# Altium PCB Flight Controller.PcbDoc (part 2 of 3)
Units mm, origin at the board's own origin, x right, y up, seen from the top; angles counter-clockwise.
Board outline 152.4 x 101.6 mm, 22 copper layers (F.Cu, F.Mask, B.Cu, B.Mask, In1.Cu, F.SilkS, In2.Cu, B.SilkS, In3.Cu, F.Adhes, In4.Cu, B.Adhes, F.Paste, B.Paste, Dwgs.User, Cmts.User, Eco1.User, Eco2.User, Edge.Cuts, Margin, B.CrtYd, F.CrtYd); 168 components, 0 nets, 572 pads, 361 vias.
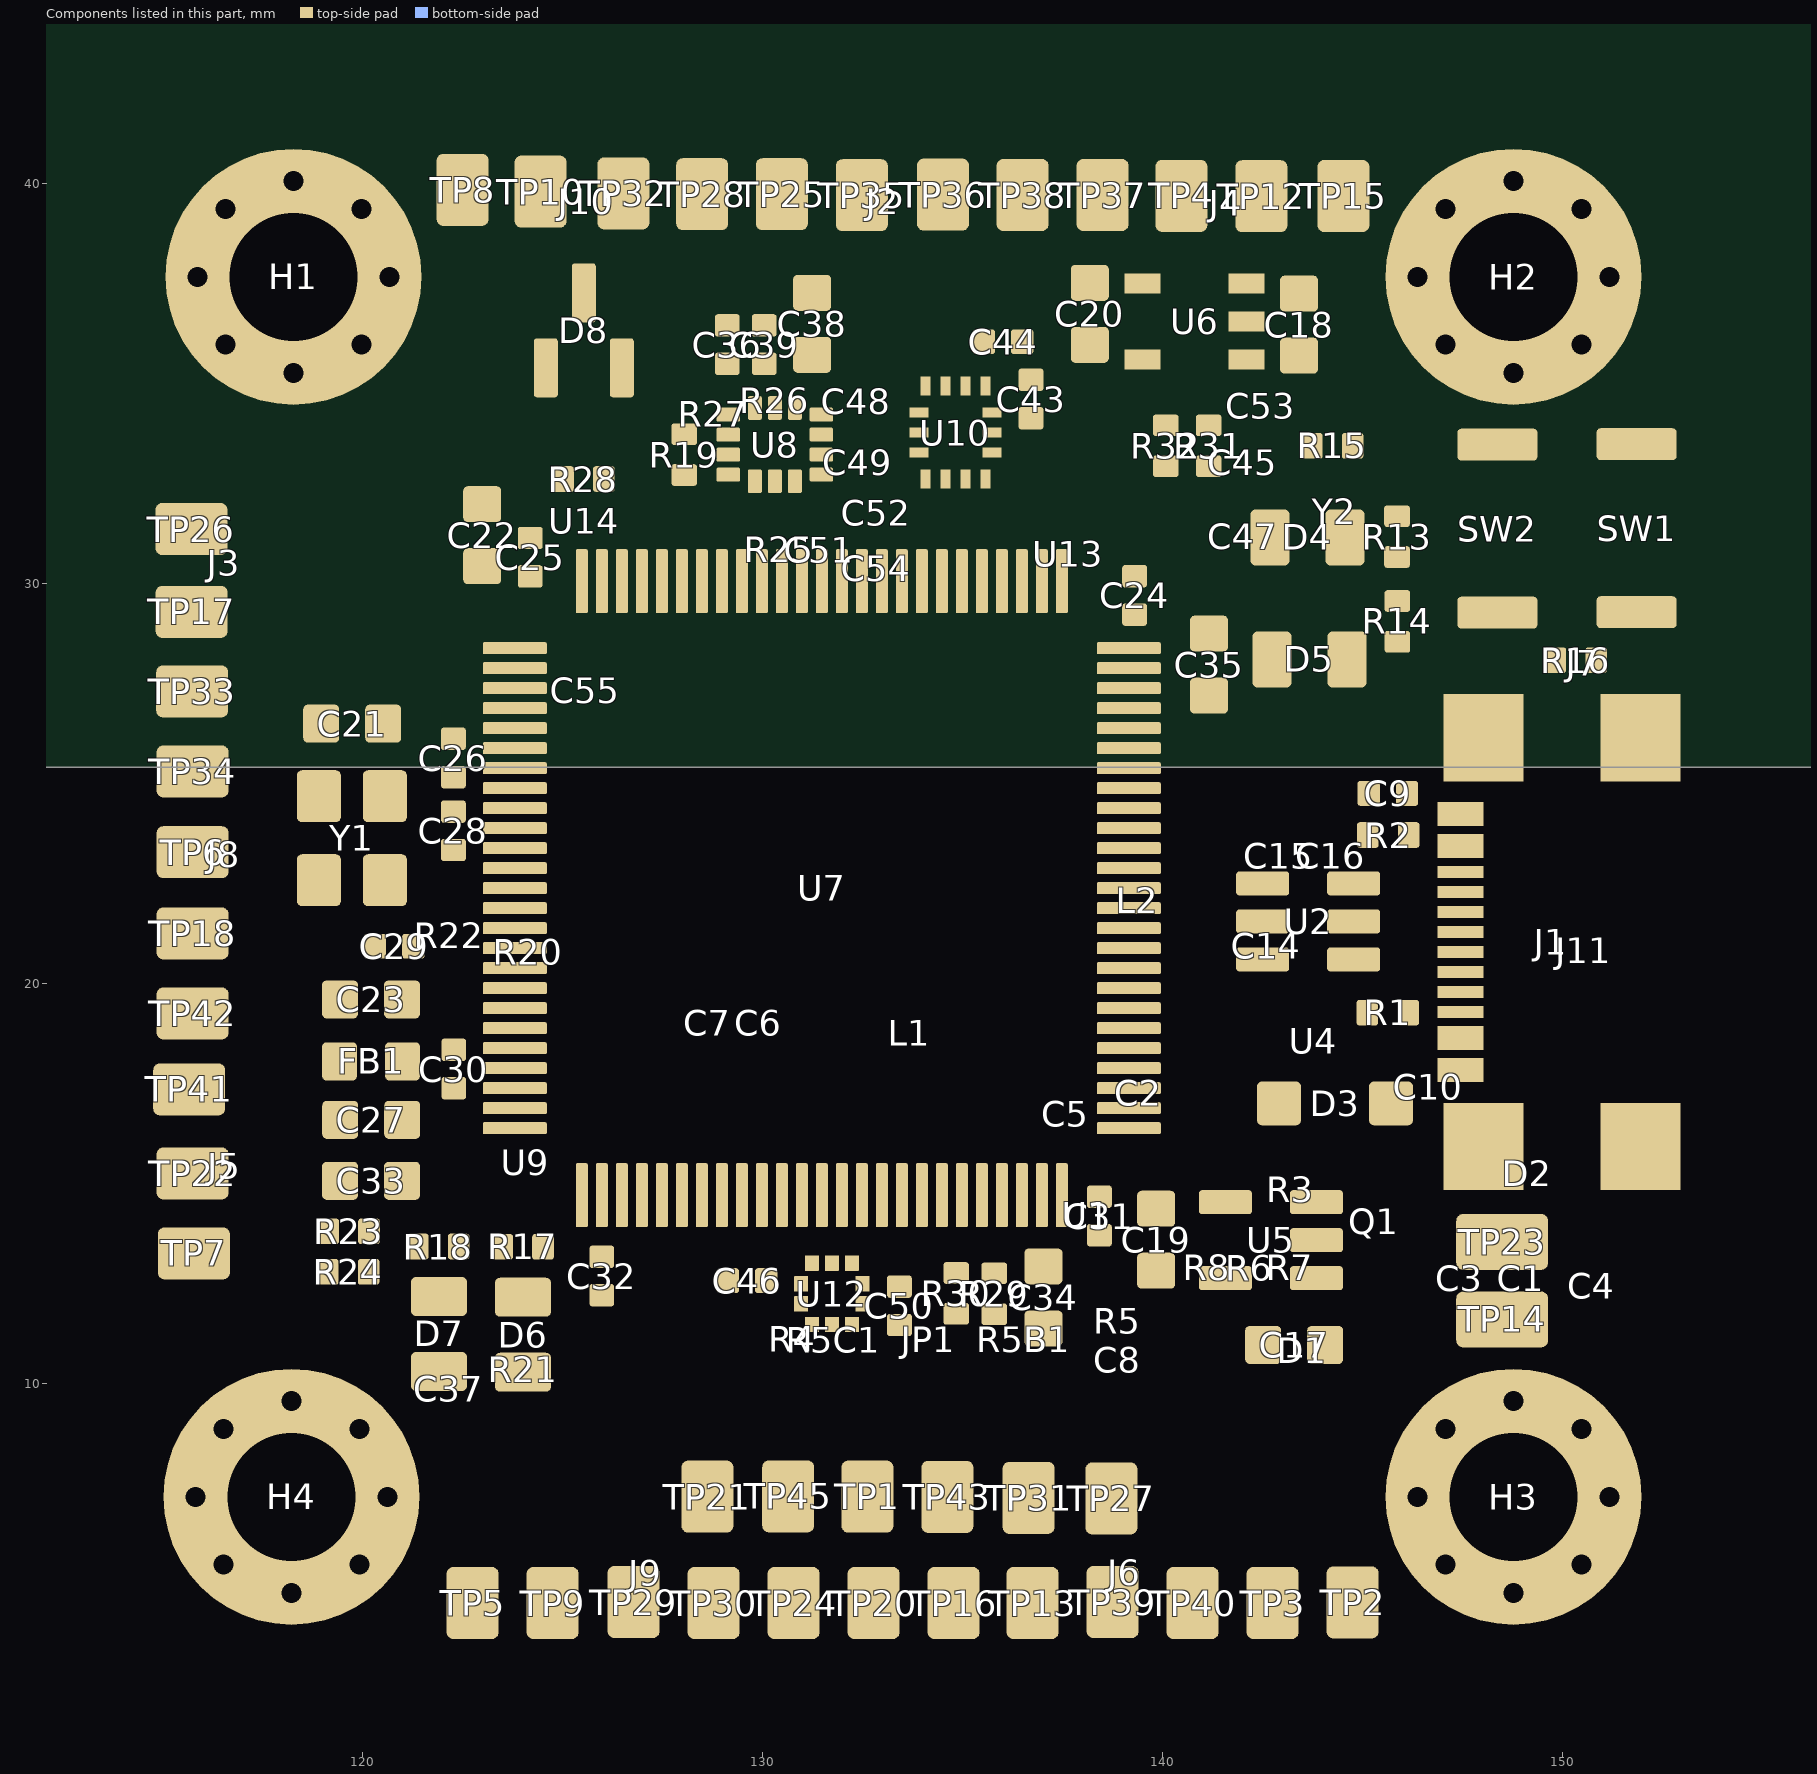
[diagram p13: the components of this part, seen from the top]

## Footprints (in the part's own frame and the unit in brackets; to place one, negate y for a bottom-side part, rotate by r counter-clockwise, add the part's x,y. Pads: shape width x height; smd on the part's side, far side on the other; paste and mask are expansions set on the pad) (continued)
PQFN50P300X250X97-14N [mm]
  rrect25% 0.59x0.35 smd paste-0.59 mask-0.59: 1(-1.165,0.75) 2(-1.165,0.25) 3(-1.165,-0.25) 4(-1.165,-0.75) 8(1.165,-0.75) 9(1.165,-0.25) 10(1.165,0.25) 11(1.165,0.75)
  rrect25% 0.35x0.59 smd paste-0.59 mask-0.59: 5(-0.5,-0.915) 6(0,-0.915) 7(0.5,-0.915) 12(0.5,0.915) 13(0,0.915) 14(-0.5,0.915)
  F.Mask region: -0.932,0.974 -0.925,0.973 -0.919,0.972 -0.913,0.971 -0.906,0.969 -0.9,0.967 -0.894,0.964 -0.888,0.961 -0.882,0.958 -0.877,0.955 -0.872,0.951 -0.866,0.947 -0.861,0.943 -0.857,0.938 -0.852,0.934 -0.848,0.929 -0.844,0.923 -0.84,0.918 -0.837,0.912 -0.834,0.907 -0.831,0.901 -0.828,0.895 -0.826,0.889 -0.824,0.882 -0.823,0.876 -0.822,0.87 -0.821,0.863 -0.82,0.857 -0.82,0.85 -0.82,0.65 -0.82,0.643 -0.821,0.637 -0.822,0.63 -0.823,0.624 -0.824,0.618 -0.826,0.611 -0.828,0.605 -0.831,0.599 -0.834,0.593 -0.837,0.588 -0.84,0.582 -0.844,0.577 -0.848,0.571 -0.852,0.566 -0.857,0.562 -0.861,0.557 -0.866,0.553 -0.872,0.549 -0.877,0.545 -0.882,0.542 -0.888,0.539 -0.894,0.536 -0.9,0.533 -0.906,0.531 -0.913,0.529 -0.919,0.528 -0.925,0.527 -0.932,0.526 -0.938,0.525 -1.392,0.525 -1.398,0.526 -1.405,0.527 -1.411,0.528 -1.417,0.529 -1.424,0.531 -1.43,0.533 -1.436,0.536 -1.442,0.539 -1.448,0.542 -1.453,0.545 -1.458,0.549 -1.464,0.553 -1.469,0.557 -1.473,0.562 -1.478,0.566 -1.482,0.571 -1.486,0.577 -1.49,0.582 -1.493,0.588 -1.496,0.593 -1.499,0.599 -1.502,0.605 -1.504,0.611 -1.506,0.618 -1.507,0.624 -1.508,0.63 -1.509,0.637 -1.51,0.643 -1.51,0.65 -1.51,0.85 -1.51,0.857 -1.509,0.863 -1.508,0.87 -1.507,0.876 -1.506,0.882 -1.504,0.889 -1.502,0.895 -1.499,0.901 -1.496,0.907 -1.493,0.912 -1.49,0.918 -1.486,0.923 -1.482,0.929 -1.478,0.934 -1.473,0.938 -1.469,0.943 -1.464,0.947 -1.458,0.951 -1.453,0.955 -1.448,0.958 -1.442,0.961 -1.436,0.964 -1.43,0.967 -1.424,0.969 -1.417,0.971 -1.411,0.972 -1.405,0.973 -1.398,0.974 -1.392,0.975 -0.938,0.975
  F.Mask region: -0.932,0.474 -0.925,0.473 -0.919,0.472 -0.913,0.471 -0.906,0.469 -0.9,0.467 -0.894,0.464 -0.888,0.461 -0.882,0.458 -0.877,0.455 -0.872,0.451 -0.866,0.447 -0.861,0.443 -0.857,0.438 -0.852,0.434 -0.848,0.429 -0.844,0.423 -0.84,0.418 -0.837,0.412 -0.834,0.407 -0.831,0.401 -0.828,0.395 -0.826,0.389 -0.824,0.382 -0.823,0.376 -0.822,0.37 -0.821,0.363 -0.82,0.357 -0.82,0.35 -0.82,0.15 -0.82,0.143 -0.821,0.137 -0.822,0.13 -0.823,0.124 -0.824,0.118 -0.826,0.111 -0.828,0.105 -0.831,0.099 -0.834,0.093 -0.837,0.088 -0.84,0.082 -0.844,0.077 -0.848,0.071 -0.852,0.066 -0.857,0.062 -0.861,0.057 -0.866,0.053 -0.872,0.049 -0.877,0.045 -0.882,0.042 -0.888,0.039 -0.894,0.036 -0.9,0.033 -0.906,0.031 -0.913,0.029 -0.919,0.028 -0.925,0.027 -0.932,0.026 -0.938,0.025 -1.392,0.025 -1.398,0.026 -1.405,0.027 -1.411,0.028 -1.417,0.029 -1.424,0.031 -1.43,0.033 -1.436,0.036 -1.442,0.039 -1.448,0.042 -1.453,0.045 -1.458,0.049 -1.464,0.053 -1.469,0.057 -1.473,0.062 -1.478,0.066 -1.482,0.071 -1.486,0.077 -1.49,0.082 -1.493,0.088 -1.496,0.093 -1.499,0.099 -1.502,0.105 -1.504,0.111 -1.506,0.118 -1.507,0.124 -1.508,0.13 -1.509,0.137 -1.51,0.143 -1.51,0.15 -1.51,0.35 -1.51,0.357 -1.509,0.363 -1.508,0.37 -1.507,0.376 -1.506,0.382 -1.504,0.389 -1.502,0.395 -1.499,0.401 -1.496,0.407 -1.493,0.412 -1.49,0.418 -1.486,0.423 -1.482,0.429 -1.478,0.434 -1.473,0.438 -1.469,0.443 -1.464,0.447 -1.458,0.451 -1.453,0.455 -1.448,0.458 -1.442,0.461 -1.436,0.464 -1.43,0.467 -1.424,0.469 -1.417,0.471 -1.411,0.472 -1.405,0.473 -1.398,0.474 -1.392,0.475 -0.938,0.475
  F.Mask region: -0.932,-0.026 -0.925,-0.027 -0.919,-0.028 -0.913,-0.029 -0.906,-0.031 -0.9,-0.033 -0.894,-0.036 -0.888,-0.039 -0.882,-0.042 -0.877,-0.045 -0.872,-0.049 -0.866,-0.053 -0.861,-0.057 -0.857,-0.062 -0.852,-0.066 -0.848,-0.071 -0.844,-0.077 -0.84,-0.082 -0.837,-0.088 -0.834,-0.093 -0.831,-0.099 -0.828,-0.105 -0.826,-0.111 -0.824,-0.118 -0.823,-0.124 -0.822,-0.13 -0.821,-0.137 -0.82,-0.143 -0.82,-0.15 -0.82,-0.35 -0.82,-0.357 -0.821,-0.363 -0.822,-0.37 -0.823,-0.376 -0.824,-0.382 -0.826,-0.389 -0.828,-0.395 -0.831,-0.401 -0.834,-0.407 -0.837,-0.412 -0.84,-0.418 -0.844,-0.423 -0.848,-0.429 -0.852,-0.434 -0.857,-0.438 -0.861,-0.443 -0.866,-0.447 -0.872,-0.451 -0.877,-0.455 -0.882,-0.458 -0.888,-0.461 -0.894,-0.464 -0.9,-0.467 -0.906,-0.469 -0.913,-0.471 -0.919,-0.472 -0.925,-0.473 -0.932,-0.474 -0.938,-0.475 -1.392,-0.475 -1.398,-0.474 -1.405,-0.473 -1.411,-0.472 -1.417,-0.471 -1.424,-0.469 -1.43,-0.467 -1.436,-0.464 -1.442,-0.461 -1.448,-0.458 -1.453,-0.455 -1.458,-0.451 -1.464,-0.447 -1.469,-0.443 -1.473,-0.438 -1.478,-0.434 -1.482,-0.429 -1.486,-0.423 -1.49,-0.418 -1.493,-0.412 -1.496,-0.407 -1.499,-0.401 -1.502,-0.395 -1.504,-0.389 -1.506,-0.382 -1.507,-0.376 -1.508,-0.37 -1.509,-0.363 -1.51,-0.357 -1.51,-0.35 -1.51,-0.15 -1.51,-0.143 -1.509,-0.137 -1.508,-0.13 -1.507,-0.124 -1.506,-0.118 -1.504,-0.111 -1.502,-0.105 -1.499,-0.099 -1.496,-0.093 -1.493,-0.088 -1.49,-0.082 -1.486,-0.077 -1.482,-0.071 -1.478,-0.066 -1.473,-0.062 -1.469,-0.057 -1.464,-0.053 -1.458,-0.049 -1.453,-0.045 -1.448,-0.042 -1.442,-0.039 -1.436,-0.036 -1.43,-0.033 -1.424,-0.031 -1.417,-0.029 -1.411,-0.028 -1.405,-0.027 -1.398,-0.026 -1.392,-0.025 -0.938,-0.025
  F.Mask region: -0.932,-0.526 -0.925,-0.527 -0.919,-0.528 -0.913,-0.529 -0.906,-0.531 -0.9,-0.533 -0.894,-0.536 -0.888,-0.539 -0.882,-0.542 -0.877,-0.545 -0.872,-0.549 -0.866,-0.553 -0.861,-0.557 -0.857,-0.562 -0.852,-0.566 -0.848,-0.571 -0.844,-0.577 -0.84,-0.582 -0.837,-0.588 -0.834,-0.593 -0.831,-0.599 -0.828,-0.605 -0.826,-0.611 -0.824,-0.618 -0.823,-0.624 -0.822,-0.63 -0.821,-0.637 -0.82,-0.643 -0.82,-0.65 -0.82,-0.85 -0.82,-0.857 -0.821,-0.863 -0.822,-0.87 -0.823,-0.876 -0.824,-0.882 -0.826,-0.889 -0.828,-0.895 -0.831,-0.901 -0.834,-0.907 -0.837,-0.912 -0.84,-0.918 -0.844,-0.923 -0.848,-0.929 -0.852,-0.934 -0.857,-0.938 -0.861,-0.943 -0.866,-0.947 -0.872,-0.951 -0.877,-0.955 -0.882,-0.958 -0.888,-0.961 -0.894,-0.964 -0.9,-0.967 -0.906,-0.969 -0.913,-0.971 -0.919,-0.972 -0.925,-0.973 -0.932,-0.974 -0.938,-0.975 -1.392,-0.975 -1.398,-0.974 -1.405,-0.973 -1.411,-0.972 -1.417,-0.971 -1.424,-0.969 -1.43,-0.967 -1.436,-0.964 -1.442,-0.961 -1.448,-0.958 -1.453,-0.955 -1.458,-0.951 -1.464,-0.947 -1.469,-0.943 -1.473,-0.938 -1.478,-0.934 -1.482,-0.929 -1.486,-0.923 -1.49,-0.918 -1.493,-0.912 -1.496,-0.907 -1.499,-0.901 -1.502,-0.895 -1.504,-0.889 -1.506,-0.882 -1.507,-0.876 -1.508,-0.87 -1.509,-0.863 -1.51,-0.857 -1.51,-0.85 -1.51,-0.65 -1.51,-0.643 -1.509,-0.637 -1.508,-0.63 -1.507,-0.624 -1.506,-0.618 -1.504,-0.611 -1.502,-0.605 -1.499,-0.599 -1.496,-0.593 -1.493,-0.588 -1.49,-0.582 -1.486,-0.577 -1.482,-0.571 -1.478,-0.566 -1.473,-0.562 -1.469,-0.557 -1.464,-0.553 -1.458,-0.549 -1.453,-0.545 -1.448,-0.542 -1.442,-0.539 -1.436,-0.536 -1.43,-0.533 -1.424,-0.531 -1.417,-0.529 -1.411,-0.528 -1.405,-0.527 -1.398,-0.526 -1.392,-0.525 -0.938,-0.525
  F.Mask region: -0.387,1.259 -0.38,1.258 -0.374,1.257 -0.368,1.256 -0.361,1.254 -0.355,1.252 -0.349,1.249 -0.343,1.246 -0.338,1.243 -0.332,1.24 -0.327,1.236 -0.321,1.232 -0.316,1.228 -0.312,1.223 -0.307,1.219 -0.303,1.214 -0.299,1.208 -0.295,1.203 -0.292,1.198 -0.289,1.192 -0.286,1.186 -0.283,1.18 -0.281,1.174 -0.279,1.167 -0.278,1.161 -0.277,1.155 -0.276,1.148 -0.275,1.142 -0.275,1.135 -0.275,0.695 -0.275,0.688 -0.276,0.682 -0.277,0.675 -0.278,0.669 -0.279,0.663 -0.281,0.656 -0.283,0.65 -0.286,0.644 -0.289,0.638 -0.292,0.632 -0.295,0.627 -0.299,0.622 -0.303,0.616 -0.307,0.611 -0.312,0.607 -0.316,0.602 -0.321,0.598 -0.327,0.594 -0.332,0.59 -0.338,0.587 -0.343,0.584 -0.349,0.581 -0.355,0.578 -0.361,0.576 -0.368,0.574 -0.374,0.573 -0.38,0.572 -0.387,0.571 -0.393,0.57 -0.607,0.57 -0.613,0.571 -0.62,0.572 -0.626,0.573 -0.632,0.574 -0.639,0.576 -0.645,0.578 -0.651,0.581 -0.657,0.584 -0.663,0.587 -0.668,0.59 -0.673,0.594 -0.679,0.598 -0.684,0.602 -0.688,0.607 -0.693,0.611 -0.697,0.616 -0.701,0.622 -0.705,0.627 -0.708,0.632 -0.711,0.638 -0.714,0.644 -0.717,0.65 -0.719,0.656 -0.721,0.663 -0.722,0.669 -0.723,0.675 -0.724,0.682 -0.725,0.688 -0.725,0.695 -0.725,1.135 -0.725,1.142 -0.724,1.148 -0.723,1.155 -0.722,1.161 -0.721,1.167 -0.719,1.174 -0.717,1.18 -0.714,1.186 -0.711,1.192 -0.708,1.198 -0.705,1.203 -0.701,1.208 -0.697,1.214 -0.693,1.219 -0.688,1.223 -0.684,1.228 -0.679,1.232 -0.673,1.236 -0.668,1.24 -0.662,1.243 -0.657,1.246 -0.651,1.249 -0.645,1.252 -0.639,1.254 -0.632,1.256 -0.626,1.257 -0.62,1.258 -0.613,1.259 -0.607,1.26 -0.393,1.26
  F.Mask region: -0.387,-0.571 -0.38,-0.572 -0.374,-0.573 -0.368,-0.574 -0.361,-0.576 -0.355,-0.578 -0.349,-0.581 -0.343,-0.584 -0.338,-0.587 -0.332,-0.59 -0.327,-0.594 -0.321,-0.598 -0.316,-0.602 -0.312,-0.607 -0.307,-0.611 -0.303,-0.616 -0.299,-0.622 -0.295,-0.627 -0.292,-0.632 -0.289,-0.638 -0.286,-0.644 -0.283,-0.65 -0.281,-0.656 -0.279,-0.663 -0.278,-0.669 -0.277,-0.675 -0.276,-0.682 -0.275,-0.688 -0.275,-0.695 -0.275,-1.135 -0.275,-1.142 -0.276,-1.148 -0.277,-1.155 -0.278,-1.161 -0.279,-1.167 -0.281,-1.174 -0.283,-1.18 -0.286,-1.186 -0.289,-1.192 -0.292,-1.198 -0.295,-1.203 -0.299,-1.208 -0.303,-1.214 -0.307,-1.219 -0.312,-1.223 -0.316,-1.228 -0.321,-1.232 -0.327,-1.236 -0.332,-1.24 -0.338,-1.243 -0.343,-1.246 -0.349,-1.249 -0.355,-1.252 -0.361,-1.254 -0.368,-1.256 -0.374,-1.257 -0.38,-1.258 -0.387,-1.259 -0.393,-1.26 -0.607,-1.26 -0.613,-1.259 -0.62,-1.258 -0.626,-1.257 -0.632,-1.256 -0.639,-1.254 -0.645,-1.252 -0.651,-1.249 -0.657,-1.246 -0.663,-1.243 -0.668,-1.24 -0.673,-1.236 -0.679,-1.232 -0.684,-1.228 -0.688,-1.223 -0.693,-1.219 -0.697,-1.214 -0.701,-1.208 -0.705,-1.203 -0.708,-1.198 -0.711,-1.192 -0.714,-1.186 -0.717,-1.18 -0.719,-1.174 -0.721,-1.167 -0.722,-1.161 -0.723,-1.155 -0.724,-1.148 -0.725,-1.142 -0.725,-1.135 -0.725,-0.695 -0.725,-0.688 -0.724,-0.682 -0.723,-0.675 -0.722,-0.669 -0.721,-0.663 -0.719,-0.656 -0.717,-0.65 -0.714,-0.644 -0.711,-0.638 -0.708,-0.632 -0.705,-0.627 -0.701,-0.622 -0.697,-0.616 -0.693,-0.611 -0.688,-0.607 -0.684,-0.602 -0.679,-0.598 -0.673,-0.594 -0.668,-0.59 -0.662,-0.587 -0.657,-0.584 -0.651,-0.581 -0.645,-0.578 -0.639,-0.576 -0.632,-0.574 -0.626,-0.573 -0.62,-0.572 -0.613,-0.571 -0.607,-0.57 -0.393,-0.57
  F.Mask region: 0.113,1.259 0.12,1.258 0.126,1.257 0.132,1.256 0.139,1.254 0.145,1.252 0.151,1.249 0.157,1.246 0.163,1.243 0.168,1.24 0.173,1.236 0.179,1.232 0.184,1.228 0.188,1.223 0.193,1.219 0.197,1.214 0.201,1.208 0.205,1.203 0.208,1.198 0.211,1.192 0.214,1.186 0.217,1.18 0.219,1.174 0.221,1.167 0.222,1.161 0.223,1.155 0.224,1.148 0.225,1.142 0.225,1.135 0.225,0.695 0.225,0.688 0.224,0.682 0.223,0.675 0.222,0.669 0.221,0.663 0.219,0.656 0.217,0.65 0.214,0.644 0.211,0.638 0.208,0.632 0.205,0.627 0.201,0.622 0.197,0.616 0.193,0.611 0.188,0.607 0.184,0.602 0.179,0.598 0.173,0.594 0.168,0.59 0.163,0.587 0.157,0.584 0.151,0.581 0.145,0.578 0.139,0.576 0.132,0.574 0.126,0.573 0.12,0.572 0.113,0.571 0.107,0.57 -0.107,0.57 -0.113,0.571 -0.12,0.572 -0.126,0.573 -0.132,0.574 -0.139,0.576 -0.145,0.578 -0.151,0.581 -0.157,0.584 -0.163,0.587 -0.168,0.59 -0.173,0.594 -0.179,0.598 -0.184,0.602 -0.188,0.607 -0.193,0.611 -0.197,0.616 -0.201,0.622 -0.205,0.627 -0.208,0.632 -0.211,0.638 -0.214,0.644 -0.217,0.65 -0.219,0.656 -0.221,0.663 -0.222,0.669 -0.223,0.675 -0.224,0.682 -0.225,0.688 -0.225,0.695 -0.225,1.135 -0.225,1.142 -0.224,1.148 -0.223,1.155 -0.222,1.161 -0.221,1.167 -0.219,1.174 -0.217,1.18 -0.214,1.186 -0.211,1.192 -0.208,1.198 -0.205,1.203 -0.201,1.208 -0.197,1.214 -0.193,1.219 -0.188,1.223 -0.184,1.228 -0.179,1.232 -0.173,1.236 -0.168,1.24 -0.162,1.243 -0.157,1.246 -0.151,1.249 -0.145,1.252 -0.139,1.254 -0.132,1.256 -0.126,1.257 -0.12,1.258 -0.113,1.259 -0.107,1.26 0.107,1.26
  F.Mask region: 0.113,-0.571 0.12,-0.572 0.126,-0.573 0.132,-0.574 0.139,-0.576 0.145,-0.578 0.151,-0.581 0.157,-0.584 0.163,-0.587 0.168,-0.59 0.173,-0.594 0.179,-0.598 0.184,-0.602 0.188,-0.607 0.193,-0.611 0.197,-0.616 0.201,-0.622 0.205,-0.627 0.208,-0.632 0.211,-0.638 0.214,-0.644 0.217,-0.65 0.219,-0.656 0.221,-0.663 0.222,-0.669 0.223,-0.675 0.224,-0.682 0.225,-0.688 0.225,-0.695 0.225,-1.135 0.225,-1.142 0.224,-1.148 0.223,-1.155 0.222,-1.161 0.221,-1.167 0.219,-1.174 0.217,-1.18 0.214,-1.186 0.211,-1.192 0.208,-1.198 0.205,-1.203 0.201,-1.208 0.197,-1.214 0.193,-1.219 0.188,-1.223 0.184,-1.228 0.179,-1.232 0.173,-1.236 0.168,-1.24 0.163,-1.243 0.157,-1.246 0.151,-1.249 0.145,-1.252 0.139,-1.254 0.132,-1.256 0.126,-1.257 0.12,-1.258 0.113,-1.259 0.107,-1.26 -0.107,-1.26 -0.113,-1.259 -0.12,-1.258 -0.126,-1.257 -0.132,-1.256 -0.139,-1.254 -0.145,-1.252 -0.151,-1.249 -0.157,-1.246 -0.163,-1.243 -0.168,-1.24 -0.173,-1.236 -0.179,-1.232 -0.184,-1.228 -0.188,-1.223 -0.193,-1.219 -0.197,-1.214 -0.201,-1.208 -0.205,-1.203 -0.208,-1.198 -0.211,-1.192 -0.214,-1.186 -0.217,-1.18 -0.219,-1.174 -0.221,-1.167 -0.222,-1.161 -0.223,-1.155 -0.224,-1.148 -0.225,-1.142 -0.225,-1.135 -0.225,-0.695 -0.225,-0.688 -0.224,-0.682 -0.223,-0.675 -0.222,-0.669 -0.221,-0.663 -0.219,-0.656 -0.217,-0.65 -0.214,-0.644 -0.211,-0.638 -0.208,-0.632 -0.205,-0.627 -0.201,-0.622 -0.197,-0.616 -0.193,-0.611 -0.188,-0.607 -0.184,-0.602 -0.179,-0.598 -0.173,-0.594 -0.168,-0.59 -0.162,-0.587 -0.157,-0.584 -0.151,-0.581 -0.145,-0.578 -0.139,-0.576 -0.132,-0.574 -0.126,-0.573 -0.12,-0.572 -0.113,-0.571 -0.107,-0.57 0.107,-0.57
  F.Mask region: 0.613,1.259 0.62,1.258 0.626,1.257 0.632,1.256 0.639,1.254 0.645,1.252 0.651,1.249 0.657,1.246 0.662,1.243 0.668,1.24 0.673,1.236 0.679,1.232 0.684,1.228 0.688,1.223 0.693,1.219 0.697,1.214 0.701,1.208 0.705,1.203 0.708,1.198 0.711,1.192 0.714,1.186 0.717,1.18 0.719,1.174 0.721,1.167 0.722,1.161 0.723,1.155 0.724,1.148 0.725,1.142 0.725,1.135 0.725,0.695 0.725,0.688 0.724,0.682 0.723,0.675 0.722,0.669 0.721,0.663 0.719,0.656 0.717,0.65 0.714,0.644 0.711,0.638 0.708,0.632 0.705,0.627 0.701,0.622 0.697,0.616 0.693,0.611 0.688,0.607 0.684,0.602 0.679,0.598 0.673,0.594 0.668,0.59 0.662,0.587 0.657,0.584 0.651,0.581 0.645,0.578 0.639,0.576 0.632,0.574 0.626,0.573 0.62,0.572 0.613,0.571 0.607,0.57 0.393,0.57 0.387,0.571 0.38,0.572 0.374,0.573 0.368,0.574 0.361,0.576 0.355,0.578 0.349,0.581 0.343,0.584 0.337,0.587 0.332,0.59 0.327,0.594 0.321,0.598 0.316,0.602 0.312,0.607 0.307,0.611 0.303,0.616 0.299,0.622 0.295,0.627 0.292,0.632 0.289,0.638 0.286,0.644 0.283,0.65 0.281,0.656 0.279,0.663 0.278,0.669 0.277,0.675 0.276,0.682 0.275,0.688 0.275,0.695 0.275,1.135 0.275,1.142 0.276,1.148 0.277,1.155 0.278,1.161 0.279,1.167 0.281,1.174 0.283,1.18 0.286,1.186 0.289,1.192 0.292,1.198 0.295,1.203 0.299,1.208 0.303,1.214 0.307,1.219 0.312,1.223 0.316,1.228 0.321,1.232 0.327,1.236 0.332,1.24 0.338,1.243 0.343,1.246 0.349,1.249 0.355,1.252 0.361,1.254 0.368,1.256 0.374,1.257 0.38,1.258 0.387,1.259 0.393,1.26 0.607,1.26
  F.Mask region: 0.613,-0.571 0.62,-0.572 0.626,-0.573 0.632,-0.574 0.639,-0.576 0.645,-0.578 0.651,-0.581 0.657,-0.584 0.662,-0.587 0.668,-0.59 0.673,-0.594 0.679,-0.598 0.684,-0.602 0.688,-0.607 0.693,-0.611 0.697,-0.616 0.701,-0.622 0.705,-0.627 0.708,-0.632 0.711,-0.638 0.714,-0.644 0.717,-0.65 0.719,-0.656 0.721,-0.663 0.722,-0.669 0.723,-0.675 0.724,-0.682 0.725,-0.688 0.725,-0.695 0.725,-1.135 0.725,-1.142 0.724,-1.148 0.723,-1.155 0.722,-1.161 0.721,-1.167 0.719,-1.174 0.717,-1.18 0.714,-1.186 0.711,-1.192 0.708,-1.198 0.705,-1.203 0.701,-1.208 0.697,-1.214 0.693,-1.219 0.688,-1.223 0.684,-1.228 0.679,-1.232 0.673,-1.236 0.668,-1.24 0.662,-1.243 0.657,-1.246 0.651,-1.249 0.645,-1.252 0.639,-1.254 0.632,-1.256 0.626,-1.257 0.62,-1.258 0.613,-1.259 0.607,-1.26 0.393,-1.26 0.387,-1.259 0.38,-1.258 0.374,-1.257 0.368,-1.256 0.361,-1.254 0.355,-1.252 0.349,-1.249 0.343,-1.246 0.337,-1.243 0.332,-1.24 0.327,-1.236 0.321,-1.232 0.316,-1.228 0.312,-1.223 0.307,-1.219 0.303,-1.214 0.299,-1.208 0.295,-1.203 0.292,-1.198 0.289,-1.192 0.286,-1.186 0.283,-1.18 0.281,-1.174 0.279,-1.167 0.278,-1.161 0.277,-1.155 0.276,-1.148 0.275,-1.142 0.275,-1.135 0.275,-0.695 0.275,-0.688 0.276,-0.682 0.277,-0.675 0.278,-0.669 0.279,-0.663 0.281,-0.656 0.283,-0.65 0.286,-0.644 0.289,-0.638 0.292,-0.632 0.295,-0.627 0.299,-0.622 0.303,-0.616 0.307,-0.611 0.312,-0.607 0.316,-0.602 0.321,-0.598 0.327,-0.594 0.332,-0.59 0.338,-0.587 0.343,-0.584 0.349,-0.581 0.355,-0.578 0.361,-0.576 0.368,-0.574 0.374,-0.573 0.38,-0.572 0.387,-0.571 0.393,-0.57 0.607,-0.57
  F.Mask region: 1.398,0.974 1.405,0.973 1.411,0.972 1.417,0.971 1.424,0.969 1.43,0.967 1.436,0.964 1.442,0.961 1.448,0.958 1.453,0.955 1.458,0.951 1.464,0.947 1.469,0.943 1.473,0.938 1.478,0.934 1.482,0.929 1.486,0.923 1.49,0.918 1.493,0.912 1.496,0.907 1.499,0.901 1.502,0.895 1.504,0.889 1.506,0.882 1.507,0.876 1.508,0.87 1.509,0.863 1.51,0.857 1.51,0.85 1.51,0.65 1.51,0.643 1.509,0.637 1.508,0.63 1.507,0.624 1.506,0.618 1.504,0.611 1.502,0.605 1.499,0.599 1.496,0.593 1.493,0.588 1.49,0.582 1.486,0.577 1.482,0.571 1.478,0.566 1.473,0.562 1.469,0.557 1.464,0.553 1.458,0.549 1.453,0.545 1.448,0.542 1.442,0.539 1.436,0.536 1.43,0.533 1.424,0.531 1.417,0.529 1.411,0.528 1.405,0.527 1.398,0.526 1.392,0.525 0.938,0.525 0.932,0.526 0.925,0.527 0.919,0.528 0.913,0.529 0.906,0.531 0.9,0.533 0.894,0.536 0.888,0.539 0.882,0.542 0.877,0.545 0.872,0.549 0.866,0.553 0.861,0.557 0.857,0.562 0.852,0.566 0.848,0.571 0.844,0.577 0.84,0.582 0.837,0.588 0.834,0.593 0.831,0.599 0.828,0.605 0.826,0.611 0.824,0.618 0.823,0.624 0.822,0.63 0.821,0.637 0.82,0.643 0.82,0.65 0.82,0.85 0.82,0.857 0.821,0.863 0.822,0.87 0.823,0.876 0.824,0.882 0.826,0.889 0.828,0.895 0.831,0.901 0.834,0.907 0.837,0.912 0.84,0.918 0.844,0.923 0.848,0.929 0.852,0.934 0.857,0.938 0.861,0.943 0.866,0.947 0.872,0.951 0.877,0.955 0.882,0.958 0.888,0.961 0.894,0.964 0.9,0.967 0.906,0.969 0.913,0.971 0.919,0.972 0.925,0.973 0.932,0.974 0.938,0.975 1.392,0.975
  F.Mask region: 1.398,0.474 1.405,0.473 1.411,0.472 1.417,0.471 1.424,0.469 1.43,0.467 1.436,0.464 1.442,0.461 1.448,0.458 1.453,0.455 1.458,0.451 1.464,0.447 1.469,0.443 1.473,0.438 1.478,0.434 1.482,0.429 1.486,0.423 1.49,0.418 1.493,0.412 1.496,0.407 1.499,0.401 1.502,0.395 1.504,0.389 1.506,0.382 1.507,0.376 1.508,0.37 1.509,0.363 1.51,0.357 1.51,0.35 1.51,0.15 1.51,0.143 1.509,0.137 1.508,0.13 1.507,0.124 1.506,0.118 1.504,0.111 1.502,0.105 1.499,0.099 1.496,0.093 1.493,0.088 1.49,0.082 1.486,0.077 1.482,0.071 1.478,0.066 1.473,0.062 1.469,0.057 1.464,0.053 1.458,0.049 1.453,0.045 1.448,0.042 1.442,0.039 1.436,0.036 1.43,0.033 1.424,0.031 1.417,0.029 1.411,0.028 1.405,0.027 1.398,0.026 1.392,0.025 0.938,0.025 0.932,0.026 0.925,0.027 0.919,0.028 0.913,0.029 0.906,0.031 0.9,0.033 0.894,0.036 0.888,0.039 0.882,0.042 0.877,0.045 0.872,0.049 0.866,0.053 0.861,0.057 0.857,0.062 0.852,0.066 0.848,0.071 0.844,0.077 0.84,0.082 0.837,0.088 0.834,0.093 0.831,0.099 0.828,0.105 0.826,0.111 0.824,0.118 0.823,0.124 0.822,0.13 0.821,0.137 0.82,0.143 0.82,0.15 0.82,0.35 0.82,0.357 0.821,0.363 0.822,0.37 0.823,0.376 0.824,0.382 0.826,0.389 0.828,0.395 0.831,0.401 0.834,0.407 0.837,0.412 0.84,0.418 0.844,0.423 0.848,0.429 0.852,0.434 0.857,0.438 0.861,0.443 0.866,0.447 0.872,0.451 0.877,0.455 0.882,0.458 0.888,0.461 0.894,0.464 0.9,0.467 0.906,0.469 0.913,0.471 0.919,0.472 0.925,0.473 0.932,0.474 0.938,0.475 1.392,0.475
  F.Mask region: 1.398,-0.026 1.405,-0.027 1.411,-0.028 1.417,-0.029 1.424,-0.031 1.43,-0.033 1.436,-0.036 1.442,-0.039 1.448,-0.042 1.453,-0.045 1.458,-0.049 1.464,-0.053 1.469,-0.057 1.473,-0.062 1.478,-0.066 1.482,-0.071 1.486,-0.077 1.49,-0.082 1.493,-0.088 1.496,-0.093 1.499,-0.099 1.502,-0.105 1.504,-0.111 1.506,-0.118 1.507,-0.124 1.508,-0.13 1.509,-0.137 1.51,-0.143 1.51,-0.15 1.51,-0.35 1.51,-0.357 1.509,-0.363 1.508,-0.37 1.507,-0.376 1.506,-0.382 1.504,-0.389 1.502,-0.395 1.499,-0.401 1.496,-0.407 1.493,-0.412 1.49,-0.418 1.486,-0.423 1.482,-0.429 1.478,-0.434 1.473,-0.438 1.469,-0.443 1.464,-0.447 1.458,-0.451 1.453,-0.455 1.448,-0.458 1.442,-0.461 1.436,-0.464 1.43,-0.467 1.424,-0.469 1.417,-0.471 1.411,-0.472 1.405,-0.473 1.398,-0.474 1.392,-0.475 0.938,-0.475 0.932,-0.474 0.925,-0.473 0.919,-0.472 0.913,-0.471 0.906,-0.469 0.9,-0.467 0.894,-0.464 0.888,-0.461 0.882,-0.458 0.877,-0.455 0.872,-0.451 0.866,-0.447 0.861,-0.443 0.857,-0.438 0.852,-0.434 0.848,-0.429 0.844,-0.423 0.84,-0.418 0.837,-0.412 0.834,-0.407 0.831,-0.401 0.828,-0.395 0.826,-0.389 0.824,-0.382 0.823,-0.376 0.822,-0.37 0.821,-0.363 0.82,-0.357 0.82,-0.35 0.82,-0.15 0.82,-0.143 0.821,-0.137 0.822,-0.13 0.823,-0.124 0.824,-0.118 0.826,-0.111 0.828,-0.105 0.831,-0.099 0.834,-0.093 0.837,-0.088 0.84,-0.082 0.844,-0.077 0.848,-0.071 0.852,-0.066 0.857,-0.062 0.861,-0.057 0.866,-0.053 0.872,-0.049 0.877,-0.045 0.882,-0.042 0.888,-0.039 0.894,-0.036 0.9,-0.033 0.906,-0.031 0.913,-0.029 0.919,-0.028 0.925,-0.027 0.932,-0.026 0.938,-0.025 1.392,-0.025
  F.Mask region: 1.398,-0.526 1.405,-0.527 1.411,-0.528 1.417,-0.529 1.424,-0.531 1.43,-0.533 1.436,-0.536 1.442,-0.539 1.448,-0.542 1.453,-0.545 1.458,-0.549 1.464,-0.553 1.469,-0.557 1.473,-0.562 1.478,-0.566 1.482,-0.571 1.486,-0.577 1.49,-0.582 1.493,-0.588 1.496,-0.593 1.499,-0.599 1.502,-0.605 1.504,-0.611 1.506,-0.618 1.507,-0.624 1.508,-0.63 1.509,-0.637 1.51,-0.643 1.51,-0.65 1.51,-0.85 1.51,-0.857 1.509,-0.863 1.508,-0.87 1.507,-0.876 1.506,-0.882 1.504,-0.889 1.502,-0.895 1.499,-0.901 1.496,-0.907 1.493,-0.912 1.49,-0.918 1.486,-0.923 1.482,-0.929 1.478,-0.934 1.473,-0.938 1.469,-0.943 1.464,-0.947 1.458,-0.951 1.453,-0.955 1.448,-0.958 1.442,-0.961 1.436,-0.964 1.43,-0.967 1.424,-0.969 1.417,-0.971 1.411,-0.972 1.405,-0.973 1.398,-0.974 1.392,-0.975 0.938,-0.975 0.932,-0.974 0.925,-0.973 0.919,-0.972 0.913,-0.971 0.906,-0.969 0.9,-0.967 0.894,-0.964 0.888,-0.961 0.882,-0.958 0.877,-0.955 0.872,-0.951 0.866,-0.947 0.861,-0.943 0.857,-0.938 0.852,-0.934 0.848,-0.929 0.844,-0.923 0.84,-0.918 0.837,-0.912 0.834,-0.907 0.831,-0.901 0.828,-0.895 0.826,-0.889 0.824,-0.882 0.823,-0.876 0.822,-0.87 0.821,-0.863 0.82,-0.857 0.82,-0.85 0.82,-0.65 0.82,-0.643 0.821,-0.637 0.822,-0.63 0.823,-0.624 0.824,-0.618 0.826,-0.611 0.828,-0.605 0.831,-0.599 0.834,-0.593 0.837,-0.588 0.84,-0.582 0.844,-0.577 0.848,-0.571 0.852,-0.566 0.857,-0.562 0.861,-0.557 0.866,-0.553 0.872,-0.549 0.877,-0.545 0.882,-0.542 0.888,-0.539 0.894,-0.536 0.9,-0.533 0.906,-0.531 0.913,-0.529 0.919,-0.528 0.925,-0.527 0.932,-0.526 0.938,-0.525 1.392,-0.525
  F.SilkS circle w0.254: c-2,0.8 r0.1
  F.SilkS lines w0.254: 1.5,1.25 0.99,1.25 ; 1.5,-1.25 0.99,-1.25 ; -0.99,1.25 -1.5,1.25 ; -0.99,-1.25 -1.5,-1.25
  F.CrtYd lines w0.254: 1.75,1.5 -1.75,1.5 -1.75,-1.5 1.75,-1.5 1.75,1.5
R_0402_1005Metric#1 [mm]
  rrect25% 0.54x0.64 smd paste-0.64 mask-0.64: 1(-0.51,0) 2(0.51,0)
  F.SilkS lines w0.254: -0.154,-0.38 0.154,-0.38 ; -0.154,0.38 0.154,0.38
  F.CrtYd lines w0.254: -0.93,-0.47 0.93,-0.47 0.93,0.47 -0.93,0.47 -0.93,-0.47
R_0402_1005Metric#2 [mm]
  rrect25% 0.54x0.64 on Mid2 paste-0.64 mask-0.64: 1(-0.51,0) 2(0.51,0)
  B.SilkS lines w0.254: -0.154,0.38 0.154,0.38 ; -0.154,-0.38 0.154,-0.38
  B.CrtYd lines w0.254: -0.93,0.47 -0.93,-0.47 0.93,-0.47 0.93,0.47 -0.93,0.47
SOIC-8_3.9x4.9mm_P1.27mm [mm]
  rrect25% 1.95x0.6 on Mid2 paste-1.95 mask-1.95: 1(-2.475,-1.905) 2(-2.475,-0.635) 3(-2.475,0.635) 4(-2.475,1.905) 5(2.475,1.905) 6(2.475,0.635) 7(2.475,-0.635) 8(2.475,-1.905)
  B.SilkS region: -2.36,-2.8 -2.84,-2.8 -2.6,-2.47
  B.CrtYd lines w0.254: -2.2,2.7 -2.2,2.46 -3.7,2.46 -3.7,-2.46 -2.2,-2.46 -2.2,-2.7 2.2,-2.7 2.2,-2.46 3.7,-2.46 3.7,2.46 2.2,2.46 2.2,2.7 -2.2,2.7
SolderJumper-3_P1.3mm_Open_RoundedPad1.0x1.5mm_NumberLabels [mm]
  rect 1x0.5 on Mid2 paste-1 mask-1: 1(-1.3,0) 3(1.3,0)
  rect 1x1.5 on Mid2 paste-1.5 mask-1.5: 2(0,0)
  B.Cu circle w0: c1.3,-0.25 r0.5
  B.Cu circle w0: c1.3,0.25 r0.5
  B.Cu circle w0: c-1.3,-0.25 r0.5
  B.Cu circle w0: c-1.3,0.25 r0.5
  B.Cu region: 1.3,-0.75 0.75,-0.75 0.75,0.75 1.3,0.75
  B.Cu region: -0.75,-0.75 -1.3,-0.75 -1.3,0.75 -0.75,0.75
  B.Mask circle w0: c1.3,-0.25 r0.5
  B.Mask circle w0: c1.3,0.25 r0.5
  B.Mask circle w0: c-1.3,-0.25 r0.5
  B.Mask circle w0: c-1.3,0.25 r0.5
  B.Mask region: 1.3,-0.75 0.75,-0.75 0.75,0.75 1.3,0.75
  B.Mask region: -0.75,-0.75 -1.3,-0.75 -1.3,0.75 -0.75,0.75
  B.Mask lines w0.254: -0.75,-0.75 0.75,-0.75 0.75,0.75 -0.75,0.75 -0.75,-0.75
Solderpad [mm]
  rrect25% 1.3x1.8 smd paste-1.8 mask-1.8: 1(0,-1)
SOT-23 [mm]
  rrect25% 1.475x0.6 smd paste-1.475 mask-1.475: 1(-0.937,0.95) 2(-0.937,-0.95) 3(0.937,0)
  F.SilkS region: -1.06,0.05 -1.54,0.05 -1.3,0.38
  F.SilkS lines w0.254: -0.76,1.51 -0.76,1.56 0.76,1.56 0.76,0.56 ; -0.76,0.39 -0.76,-0.39 ; 0.76,-0.56 0.76,-1.56 -0.76,-1.56 -0.76,-1.51
  F.CrtYd lines w0.254: -0.9,1.7 0.9,1.7 0.9,0.55 1.93,0.55 1.93,-0.55 0.9,-0.55 0.9,-1.7 -0.9,-1.7 -0.9,-1.5 -1.93,-1.5 -1.93,1.5 -0.9,1.5 -0.9,1.7
SOT-23-5 [mm]
  rrect25% 1.325x0.6 smd paste-1.325 mask-1.325: 1(-1.138,0.95) 2(-1.138,0) 3(-1.138,-0.95) 4(1.138,-0.95) 5(1.138,0.95)
  F.SilkS region: -1.45,1.51 -1.69,1.84 -1.21,1.84
  F.CrtYd lines w0.254: 2.05,1.5 2.05,-1.5 1.05,-1.5 1.05,-1.7 -1.05,-1.7 -1.05,-1.5 -2.05,-1.5 -2.05,1.5 -1.05,1.5 -1.05,1.7 1.05,1.7 1.05,1.5 2.05,1.5
SOT-23-6#1 [mm]
  rrect25% 1.325x0.6 on Mid2 paste-1.325 mask-1.325: 1(-1.138,-0.95) 2(-1.138,0) 3(-1.138,0.95) 4(1.138,0.95) 5(1.138,0) 6(1.138,-0.95)
  B.SilkS region: -1.21,-1.84 -1.69,-1.84 -1.45,-1.51
  B.CrtYd lines w0.254: 1.05,-1.7 1.05,-1.5 2.05,-1.5 2.05,1.5 1.05,1.5 1.05,1.7 -1.05,1.7 -1.05,1.5 -2.05,1.5 -2.05,-1.5 -1.05,-1.5 -1.05,-1.7 1.05,-1.7
SOT-23-6#2 [mm]
  rrect25% 1.325x0.6 smd paste-1.325 mask-1.325: 1(-1.138,0.95) 2(-1.138,0) 3(-1.138,-0.95) 4(1.138,-0.95) 5(1.138,0) 6(1.138,0.95)
  F.SilkS region: -1.45,1.51 -1.69,1.84 -1.21,1.84
  F.CrtYd lines w0.254: 2.05,1.5 2.05,-1.5 1.05,-1.5 1.05,-1.7 -1.05,-1.7 -1.05,-1.5 -2.05,-1.5 -2.05,1.5 -1.05,1.5 -1.05,1.7 1.05,1.7 1.05,1.5 2.05,1.5
SW_Push_SPST_NO_Alps_SKRK [mm]
  rrect25% 0.8x2 smd paste-2 mask-2: 1(-2.1,0) 2(2.1,0)
  F.CrtYd lines w0.254: 2.75,-1.7 2.75,1.7 -2.75,1.7 -2.75,-1.7 2.75,-1.7
TSOT-23-6 [mm]
  rrect25% 1.325x0.6 on Mid2 paste-1.325 mask-1.325: 1(-1.138,-0.95) 2(-1.138,0) 3(-1.138,0.95) 4(1.138,0.95) 5(1.138,0) 6(1.138,-0.95)
  B.SilkS region: -1.21,-1.84 -1.69,-1.84 -1.45,-1.51
  B.SilkS lines w0.254: 0.91,1.56 0.91,1.51 -0.91,1.56 -0.91,1.51 ; 0.91,-1.51 0.91,-1.56 -0.91,-1.56 -0.91,-1.51
  B.CrtYd lines w0.254: 2.05,1.5 1.05,1.5 1.05,1.7 -1.05,1.7 -1.05,1.5 -2.05,1.5 -2.05,-1.5 -1.05,-1.5 -1.05,-1.7 1.05,-1.7 1.05,-1.5 2.05,-1.5 2.05,1.5
W25Q128JVSIQ [mm]
  rrect12% 1.61x0.58 on Mid2 paste-1.61 mask-1.61: 1(-3.605,-1.905) 2(-3.605,-0.635) 3(-3.605,0.635) 4(-3.605,1.905) 5(3.605,1.905) 6(3.605,0.635) 7(3.605,-0.635) 8(3.605,-1.905)
  B.SilkS circle w0.254: c-5.215,-1.905 r0.1
  B.CrtYd lines w0.254: 4.66,-2.89 4.66,2.89 -4.66,2.89 -4.66,-2.89 4.66,-2.89
XDCR_BMI270 [mm]
  rect 0.475x0.25 smd paste-0.475 mask-0.475: 1(-1.162,0.75) 2(-1.162,0.25) 3(-1.162,-0.25) 4(-1.162,-0.75) 8(1.162,-0.75) 9(1.162,-0.25) 10(1.162,0.25) 11(1.162,0.75)
  rect 0.25x0.475 smd paste-0.475 mask-0.475: 5(-0.5,-0.913) 6(0,-0.913) 7(0.5,-0.913) 12(0.5,0.913) 13(0,0.913) 14(-0.5,0.913)
  F.SilkS circle w0.254: c-2,0.9 r0.075
  F.SilkS lines w0.254: -0.945,1.25 -1.5,1.25 -1.5,1.195 ; 0.945,1.25 1.5,1.25 1.5,1.195 ; -1.5,-1.25 -1.5,-1.195 -0.945,-1.25 ; 0.945,-1.25 1.5,-1.195 1.5,-1.25
  F.CrtYd lines w0.254: -1.75,1.5 -1.75,-1.5 1.75,-1.5 1.75,1.5 -1.75,1.5

## Part data
C1 C3 C6 C7 C10 C14 C15 C16 C17 C18 C19 C20 C21 C22 C23 C27 C33 C34 C35 C38 C48 C49: library part C_0603_1608Metric, "Capacitor SMD 0603 (1608 Metric), square (rectangular) end terminal, IPC-7351 nominal, (Body size source: IPC-SM-782 page 76, https://www.pcb-3d.com/wordpress/wp-content/uploads/ipc-sm-782a_amendment_1_and_2.pdf), generated with kicad-footprint-generator", Description="Unpolarized capacitor, small symbol", ki_fp_filters=C_*
C2 C5 C8 C9 C24 C25 C26 C28 C29 C30 C31 C32 C36 C37 C39 C43 C44 C45 C46 C47 C50 C51 C52 C53 C54 C55: library part C_0402_1005Metric, "Capacitor SMD 0402 (1005 Metric), square (rectangular) end terminal, IPC-7351 nominal, (Body size source: IPC-SM-782 page 76, https://www.pcb-3d.com/wordpress/wp-content/uploads/ipc-sm-782a_amendment_1_and_2.pdf), generated with kicad-footprint-generator", Description="Unpolarized capacitor, small symbol", ki_fp_filters=C_*
C4: library part C_0805_2012Metric, "Capacitor SMD 0805 (2012 Metric), square (rectangular) end terminal, IPC-7351 nominal, (Body size source: IPC-SM-782 page 76, https://www.pcb-3d.com/wordpress/wp-content/uploads/ipc-sm-782a_amendment_1_and_2.pdf, https://docs.google.com/spreadsheets/d/1BsfQQcO9C6DZCsRaXUlFlo91Tg2WpOkGARC1WS5S8t0/edit?usp=sharing), generated with kicad-footprint-generator", Description="Unpolarized capacitor, small symbol", ki_fp_filters=C_*
D1: library part D_SMF, "Diode SMF (DO-219AB), http://www.vishay.com/docs/95572/smf_do-219ab.pdf", Datasheet=https://www.vishay.com/doc?85881, Description="200W unidirectional Transil Transient Voltage Suppressor, 26Vrwm, SMF", ki_fp_filters=D*SMF*
D2: library part (zener)SOD-123F_L2.8-W1.8-LS3.7-RD, LCSC Part=C177013, Datasheet=https://lcsc.com/product-detail/Others_Diodes-Incorporated_BZT52C12-13-F_Diodes-Incorporated-BZT52C12-13-F_C177013.html
D3: library part D_SOD-123F, "D_SOD-123F", Datasheet=https://assets.nexperia.com/documents/data-sheet/PMEG2010EH_EJ_ET.pdf, Description="20V, 1A very low Vf MEGA Schottky barrier rectifier, SOD-123F", ki_fp_filters=D*SOD?123F*
D4 D5 D6 D7: library part LED_0805_2012Metric, "LED SMD 0805 (2012 Metric), square (rectangular) end terminal, IPC-7351 nominal, (Body size source: https://docs.google.com/spreadsheets/d/1BsfQQcO9C6DZCsRaXUlFlo91Tg2WpOkGARC1WS5S8t0/edit?usp=sharing), generated with kicad-footprint-generator", Description="Light emitting diode", Sim.Pins="1=K 2=A", ki_fp_filters="LED* LED_SMD:* LED_THT:*"
D8: library part SOT-23, "SOT, 3 Pin (JEDEC TO-236 Var AB https://www.jedec.org/document_search?search_api_views_fulltext=TO-236), generated with kicad-footprint-generator ipc_gullwing_generator.py", Datasheet=https://www.littelfuse.com/~/media/electronics/datasheets/tvs_diode_arrays/littelfuse_tvs_diode_array_sm712_datasheet.pdf.pdf, Description="7V/12V, 600W Asymmetrical TVS Diode Array, SOT-23", ki_fp_filters=SOT?23*
FB1: library part L_0603_1608Metric, "Inductor SMD 0603 (1608 Metric), square (rectangular) end terminal, IPC-7351 nominal, (Body size source: http://www.tortai-tech.com/upload/download/2011102023233369053.pdf), generated with kicad-footprint-generator", Description="Ferrite bead, small symbol", ki_fp_filters="Inductor_* L_* *Ferrite*"
G*** G*** G***: library part LOGO
H1 H2 H3 H4: library part MountingHole_3.2mm_M3_Pad_Via, "Mounting Hole 3.2mm, M3, generated by kicad-footprint-generator mountinghole.py", ki_fp_filters=MountingHole*
J1: library part GCT_USB4110GFA, Package=None, MF="Global Connector Technology", Description_1="USB-C (USB TYPE-C) USB 2.0 Receptacle Connector 24 (16+8 Dummy) Position Surface Mount, Right Angle", Price=None, SnapEDA_Link=https://www.snapeda.com/parts/USB4110GFA/Global+Connector+Technology/view-part/?ref=snap, MP=USB4110GFA, Availability="In Stock", Check_prices=https://www.snapeda.com/parts/USB4110GFA/Global+Connector+Technology/view-part/?ref=eda
J2 J3 J5 J7 J8 J10 J11: library part CONN-SMD_4P-P1.00_SM04B-SRSS-TB-LF-SN, ki_fp_filters=Connector*:*_1x??_*
  J3 J7: Description="Generic connector, single row, 01x04, script generated (kicad-library-utils/schlib/autogen/connector/)"
J4 J9: library part JST_SH_SM06B-SRSS-TB_1x06-1MP_P1.00mm_Horizontal, "JST SH series connector, SM06B-SRSS-TB (http://www.jst-mfg.com/product/pdf/eng/eSH.pdf), generated with kicad-footprint-generator", Description="Generic connector, single row, 01x06, script generated (kicad-library-utils/schlib/autogen/connector/)", ki_fp_filters=Connector*:*_1x??_*
J6: library part JST_SH_SM08B-SRSS-TB_1x08-1MP_P1.00mm_Horizontal, "JST SH series connector, SM08B-SRSS-TB (http://www.jst-mfg.com/product/pdf/eng/eSH.pdf), generated with kicad-footprint-generator", Description="Generic connector, single row, 01x08, script generated (kicad-library-utils/schlib/autogen/connector/)", ki_fp_filters=Connector*:*_1x??_*
JP1: library part SolderJumper-3_P1.3mm_Open_RoundedPad1.0x1.5mm_NumberLabels, "SMD Solder 3-pad Jumper, 1x1.5mm rounded Pads, 0.3mm gap, open, labeled with numbers", Description="Solder Jumper, 3-pole, open", ki_fp_filters=SolderJumper*Open*
L1: library part IND-SMD_L5.4-W5.2, Description="Inductor, small symbol", ki_fp_filters="Choke_* *Coil* Inductor_* L_*"
L2: library part IND-SMD_L4.4-W4.2, Description="Inductor, small symbol", ki_fp_filters="Choke_* *Coil* Inductor_* L_*"
Q1: library part AO3407A, LCSC Part=C15155, Datasheet=https://lcsc.com/product-detail/MOSFET_AOS_AO3407A_AO3407A_C15155.html
R1 R2 R3 R4 R5 R5B1 R5C1 R6 R7 R13 R14 R15 R16 R17 R18 R19 R20 R21 R22 R23 R24 R25 R26 R27 R28 R29 R30: library part R_0402_1005Metric, "Resistor SMD 0402 (1005 Metric), square (rectangular) end terminal, IPC-7351 nominal, (Body size source: IPC-SM-782 page 72, https://www.pcb-3d.com/wordpress/wp-content/uploads/ipc-sm-782a_amendment_1_and_2.pdf), generated with kicad-footprint-generator", Description="Resistor, small symbol", ki_fp_filters=R_*
R8 R31 R32: library part R_0402_1005Metric, "Resistor SMD 0402 (1005 Metric), square (rectangular) end terminal, IPC-7351 nominal, (Body size source: IPC-SM-782 page 72, https://www.pcb-3d.com/wordpress/wp-content/uploads/ipc-sm-782a_amendment_1_and_2.pdf)", Description="Resistor, small symbol", KiLib_Generator=SMD_2terminal_chip_molded, ki_fp_filters=R_*
SW1 SW2: library part SW_Push_SPST_NO_Alps_SKRK, "http://www.alps.com/prod/info/E/HTML/Tact/SurfaceMount/SKRK/SKRKAHE020.html", Description="Push button switch, generic, two pins"
TP1 TP2 TP3 TP4 TP5 TP6 TP7 TP8 TP9 TP10 TP12 TP13 TP15 TP16 TP17 TP18 TP20 TP21 TP22 TP24 TP25 TP26 TP27 TP28 TP29 TP30 TP31 TP32 TP33 TP34 TP35 TP36 TP37 TP38 TP39 TP40 TP41 TP42 TP43 TP45: library part Solderpad, Description="test point", ki_fp_filters="Pin* Test*"
TP14 TP23: library part "BAT pad", Description="test point", ki_fp_filters="Pin* Test*"
U1 U2: library part SOT-23-6, "SOT, 6 Pin (JEDEC MO-178 Var AB https://www.jedec.org/document_search?search_api_views_fulltext=MO-178), generated with kicad-footprint-generator ipc_gullwing_generator.py", ki_fp_filters=SOT?23*
  U1: Datasheet=http://www.ti.com/lit/ds/symlink/tps54302.pdf, Description="3A, 4.5 to 28V Input, EMI Friendly integrated switch synchronous step-down regulator, pulse-skipping, SOT-23-6"
  U2: Datasheet=https://www.st.com/resource/en/datasheet/usblc6-2.pdf, Description="Very low capacitance ESD protection diode, 2 data-line, SOT-23-6"
U4: library part TSOT-23-6, "TSOT, 6 Pin (https://www.jedec.org/sites/default/files/docs/MO-193D.pdf variant AA), generated with kicad-footprint-generator ipc_gullwing_generator.py", Datasheet=https://www.diodes.com/assets/Datasheets/AP63200-AP63201-AP63203-AP63205.pdf, Description="2A, 1.1MHz Buck DC/DC Converter, fixed 5.0V output voltage, TSOT-23-6", ki_fp_filters=TSOT?23*
U5: library part SOT-23-5, "SOT, 5 Pin (JEDEC MO-178 Var AA https://www.jedec.org/document_search?search_api_views_fulltext=MO-178), generated with kicad-footprint-generator ipc_gullwing_generator.py", Datasheet=https://www.diodes.com/assets/Datasheets/AP2112.pdf, Description="600mA low dropout linear regulator, with enable pin, 3.8V-6V input voltage range, 3.3V fixed positive output, SOT-23-5", ki_fp_filters=SOT?23?5*
U6: library part "(AP7343 )SOT-25_L3.0-W1.6-P0.95-LS2.8-BL", LCSC Part=C460383, Datasheet=https://lcsc.com/product-detail/presales_Diodes-Incorporated-AP7343-33W5-7_C460383.html
U7: library part LQFP-100_14x14mm_P0.5mm, "LQFP, 100 Pin (https://www.nxp.com/docs/en/package-information/SOT407-1.pdf), generated with kicad-footprint-generator ipc_gullwing_generator.py", Datasheet=https://www.st.com/resource/en/datasheet/stm32h743vi.pdf, Description="STMicroelectronics Arm Cortex-M7 MCU, 2048KB flash, 1024KB RAM, 480 MHz, 1.71-3.6V, 82 GPIO, LQFP100", ki_fp_filters=LQFP*14x14mm*P0.5mm*
U8: library part PQFN50P300X250X97-14N, MAXIMUM_PACKAGE_HEIGHT=0.97mm, Package="LGA-14 TDK InvenSense", MANUFACTURER="TDK InvenSense", MF="TDK InvenSense", Price=None, Check_prices=https://www.snapeda.com/parts/ICM-42688-P/TDK/view-part/?ref=eda, STANDARD=IPC-7351B, PARTREV=1.2, SnapEDA_Link=https://www.snapeda.com/parts/ICM-42688-P/TDK/view-part/?ref=snap, MP=ICM-42688-P, Description_1="Accelerometer, Gyroscope, 6 Axis Sensor - Output", Availability="In Stock"
U9: library part W25Q128JVSIQ, MAXIMUM_PACKAGE_HEIGHT="2.16 mm", Package="SOIC-8 Winbond Electronics", MANUFACTURER="Winbond Electronics", MF="Winbond Electronics", Price=None, Check_prices=https://www.snapeda.com/parts/W25Q128JVSIQ/Winbond/view-part/?ref=eda, STANDARD=IPC-7351B, PARTREV=I, SnapEDA_Link=https://www.snapeda.com/parts/W25Q128JVSIQ/Winbond/view-part/?ref=snap, MP=W25Q128JVSIQ, Description_1="FLASH - NOR Memory IC 128Mb (16M x 8) SPI - Quad I/O, QPI, DTR 133 MHz 8-SOIC", Availability="In Stock"
U10: library part XDCR_BMI270, MAXIMUM_PACKAGE_HEIGHT=0.87mm, Package="LGA-14 Bosch Sensortec", MANUFACTURER="Bosch Sensortec", PATREV=1.0, MF="Bosch Sensortec", Price=None, Check_prices=https://www.snapeda.com/parts/BMI270/Bosch/view-part/?ref=eda, STANDARD="Manufacturer Recommendations", SnapEDA_Link=https://www.snapeda.com/parts/BMI270/Bosch/view-part/?ref=snap, MP=BMI270, Description_1="Accelerometer, Gyroscope, 6 Axis Sensor I2C, SPI Output", Availability="In Stock"
U12: library part PQFN50P200X200X80-10N, Package="WFLGA-10 Bosch Tools", MANUFACTURER=BOSCH, MF="Bosch Sensortec", Description_1="Pressure Sensor 4.35PSI ~ 18.13PSI (30kPa ~ 125kPa) Absolute - - 10-WFLGA", Price=None, Check_prices=https://www.snapeda.com/parts/BMP388/Bosch/view-part/?ref=eda, STANDARD="IPC 7351B", PARTREV=1.1, SnapEDA_Link=https://www.snapeda.com/parts/BMP388/Bosch/view-part/?ref=snap, MP=BMP388, Availability="In Stock"
U13: library part AT7456E, LCSC Part=C82351, Datasheet=https://lcsc.com/product-detail/Analog-ICs_AT7456E_C82351.html
U14: library part SOIC-8_3.9x4.9mm_P1.27mm, "SOIC, 8 Pin (JEDEC MS-012AA, https://www.analog.com/media/en/package-pcb-resources/package/pkg_pdf/soic_narrow-r/r_8.pdf), generated with kicad-footprint-generator ipc_gullwing_generator.py", Datasheet=http://www.ti.com/lit/ds/symlink/sn65hvd230.pdf, Description="CAN Bus Transceivers, 3.3V, 1Mbps, Low-Power capabilities, SOIC-8", ki_fp_filters=SOIC*3.9x4.9mm*P1.27mm*
Y1: library part Oscillator_SMD_Abracon_ASE-4Pin_3.2x2.5mm, "Abracon ASE, Miniature Crystal Clock Oscillator, 3.2x2.5mm package, SMD, generated with kicad-footprint-generator make_crystal.py, http://www.abracon.com/Oscillators/ASEseries.pdf", Datasheet=http://www.abracon.com/Oscillators/ASV.pdf, Description="3.3V CMOS SMD Crystal Clock Oscillator, Abracon", ki_fp_filters=Oscillator*SMD*Abracon*ASE*3.2x2.5mm*
Y2: library part Crystal_SMD_3225-4Pin_3.2x2.5mm, "SMD3225/4, Crystal, 3.2x2.5mm package, SMD, generated with kicad-footprint-generator make_crystal.py, http://www.txccrystal.com/images/pdf/7m-accuracy.pdf", Description="Four pin crystal, GND on pins 2 and 4", ki_fp_filters=Crystal*

## Via types
v1: diameter 0.45, hole 0.25, F.Cu to B.Cu, tented both sides, 361 vias

## Nets (pads, with @x,y where several pads share a name; then routed paths per layer and width w, separated by ;. In a path a pad name is that pad's centre, name@x,y a point inside that pad or via, vN(x,y) a via of type N, cw(c..) or ccw(c..) an arc to the next point about the centre after c; other vN are vias at no path point)
pads on no net: C1.1 C1.2 C2.1 C2.2 C3.1 C3.2 C4.1 C4.2 C5.1 C5.2 C6.1 C6.2 C7.1 C7.2 C8.1 C8.2 C9.1 C9.2 C10.1 C10.2 C14.1 C14.2 C15.1 C15.2 C16.1 C16.2 C17.1 C17.2 C18.1 C18.2 C19.1 C19.2 C20.1 C20.2 C21.1 C21.2 C22.1 C22.2 C23.1 C23.2 C24.1 C24.2 C25.1 C25.2 C26.1 C26.2 C27.1 C27.2 C28.1 C28.2 C29.1 C29.2 C30.1 C30.2 C31.1 C31.2 C32.1 C32.2 C33.1 C33.2 C34.1 C34.2 C35.1 C35.2 C36.1 C36.2 C37.1 C37.2 C38.1 C38.2 C39.1 C39.2 C43.1 C43.2 C44.1 C44.2 C45.1 C45.2 C46.1 C46.2 C47.1 C47.2 C48.1 C48.2 C49.1 C49.2 C50.1 C50.2 C51.1 C51.2 C52.1 C52.2 C53.1 C53.2 C54.1 C54.2 C55.1 C55.2 D1.1 D1.2 D2.1 D2.2 D3.1 D3.2 D4.1 D4.2 D5.1 D5.2 D6.1 D6.2 D7.1 D7.2 D8.1 D8.2 D8.3 FB1.1 FB1.2 H1.1 H2.1 H3.1 H4.1 J1.A1/B12 J1.A4/B9 J1.A5 J1.A6 J1.A7 J1.A8 J1.B1/A12 J1.B4/A9 J1.B5 J1.B6 J1.B7 J1.B8 J1.S1 J1.S2 J1.S3 J1.S4 J2.1 J2.2 J2.3 J2.4 J2.5 J2.6 J3.1 J3.2 J3.3 J3.4 J3.5 J3.6 J4.1 J4.2 J4.3 J4.4 J4.5 J4.6 J4.MP J5.1 J5.2 J5.3 J5.4 J5.5 J5.6 J6.1 J6.2 J6.3 J6.4 J6.5 J6.6 J6.7 J6.8 J6.MP J7.1 J7.2 J7.3 J7.4 J7.5 J7.6 J8.1 J8.2 J8.3 J8.4 J8.5 J8.6 J9.1 J9.2 J9.3 J9.4 J9.5 J9.6 J9.MP J10.1 J10.2 J10.3 J10.4 J10.5 J10.6 J11.1 J11.2 J11.3 J11.4 J11.5 J11.6 JP1.1 JP1.2 JP1.3 L1.1 L1.2 L2.1 L2.2 Q1.1 Q1.2 Q1.3 R1.1 R1.2 R2.1 R2.2 R3.1 R3.2 R4.1 R4.2 R5.1 R5.2 R5B1.1 R5B1.2 R5C1.1 R5C1.2 R6.1 R6.2 R7.1 R7.2 R8.1 R8.2 R13.1 R13.2 R14.1 R14.2 R15.1 R15.2 R16.1 R16.2 R17.1 R17.2 R18.1 R18.2 R19.1 R19.2 R20.1 R20.2 R21.1 R21.2 R22.1 R22.2 R23.1 R23.2 R24.1 R24.2 R25.1 R25.2 R26.1 R26.2 R27.1 R27.2 R28.1 R28.2 R29.1 R29.2 R30.1 R30.2 R31.1 R31.2 R32.1 R32.2 SW1.1 SW1.2 SW2.1 SW2.2 TP1.1 TP2.1 TP3.1 TP4.1 TP5.1 TP6.1 TP7.1 TP8.1 TP9.1 TP10.1 TP12.1 TP13.1 TP14.1 TP15.1 TP16.1 TP17.1 TP18.1 TP20.1 TP21.1 TP22.1 TP23.1 TP24.1 TP25.1 TP26.1 TP27.1 TP28.1 TP29.1 TP30.1 TP31.1 TP32.1 TP33.1 TP34.1 TP35.1 TP36.1 TP37.1 TP38.1 TP39.1 TP40.1 TP41.1 TP42.1 TP43.1 TP45.1 U1.1 U1.2 U1.3 U1.4 U1.5 U1.6 U2.1 U2.2 U2.3 U2.4 U2.5 U2.6 U4.1 U4.2 U4.3 U4.4 U4.5 U4.6 U5.1 U5.2 U5.3 U5.4 U5.5 U6.1 U6.2 U6.3 U6.4 U6.5 U7.1 U7.2 U7.3 U7.4 U7.5 U7.6 U7.7 U7.8 U7.9 U7.10 U7.11 U7.12 U7.13 U7.14 U7.15 U7.16 U7.17 U7.18 U7.19 U7.20 U7.21 U7.22 U7.23 U7.24 U7.25 U7.26 U7.27 U7.28 U7.29 U7.30 U7.31 U7.32 U7.33 U7.34 U7.35 U7.36 U7.37 U7.38 U7.39 U7.40 U7.41 U7.42 U7.43 U7.44 U7.45 U7.46 U7.47 U7.48 U7.49 U7.50 U7.51 U7.52 U7.53 U7.54 U7.55 U7.56 U7.57 U7.58 U7.59 U7.60 U7.61 U7.62 U7.63 U7.64 U7.65 U7.66 U7.67 U7.68 U7.69 U7.70 U7.71 U7.72 U7.73 U7.74 U7.75 U7.76 U7.77 U7.78 U7.79 U7.80 U7.81 U7.82 U7.83 U7.84 U7.85 U7.86 U7.87 U7.88 U7.89 U7.90 U7.91 U7.92 U7.93 U7.94 U7.95 U7.96 U7.97 U7.98 U7.99 U7.100 U8.1 U8.2 U8.3 U8.4 U8.5 U8.6 U8.7 U8.8 U8.9 U8.10 U8.11 U8.12 U8.13 U8.14 U9.1 U9.2 U9.3 U9.4 U9.5 U9.6 U9.7 U9.8 U10.1 U10.2 U10.3 U10.4 U10.5 U10.6 U10.7 U10.8 U10.9 U10.10 U10.11 U10.12 U10.13 U10.14 U12.1 U12.2 U12.3 U12.4 U12.5 U12.6 U12.7 U12.8 U12.9 U12.10 U13.1 U13.2 U13.3 U13.4 U13.5 U13.6 U13.7 U13.8 U13.9 U13.10 U13.11 U13.12 U13.13 U13.14 U13.15 U13.16 U13.17 U13.18 U13.19 U13.20 U13.21 U13.22 U13.23 U13.24 U13.25 U13.26 U13.27 U13.28 U13.29 U14.1 U14.2 U14.3 U14.4 U14.5 U14.6 U14.7 U14.8 Y1.1 Y1.2 Y1.3 Y1.4 Y2.1 Y2.2 Y2.3 Y2.4